# Altium PCB IRF7314.PcbDoc
Units mm, origin at the board's own origin, x right, y up, seen from the top; angles counter-clockwise.
Board outline 152.4 x 101.6 mm, 2 copper layers (Top Layer, Bottom Layer); 9 components, 0 nets, 30 pads, 0 vias.
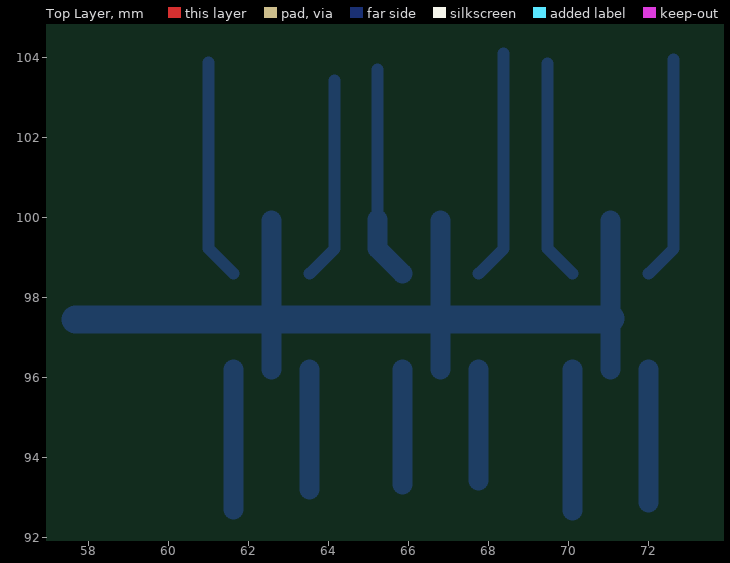
[diagram p0: Top Layer view]
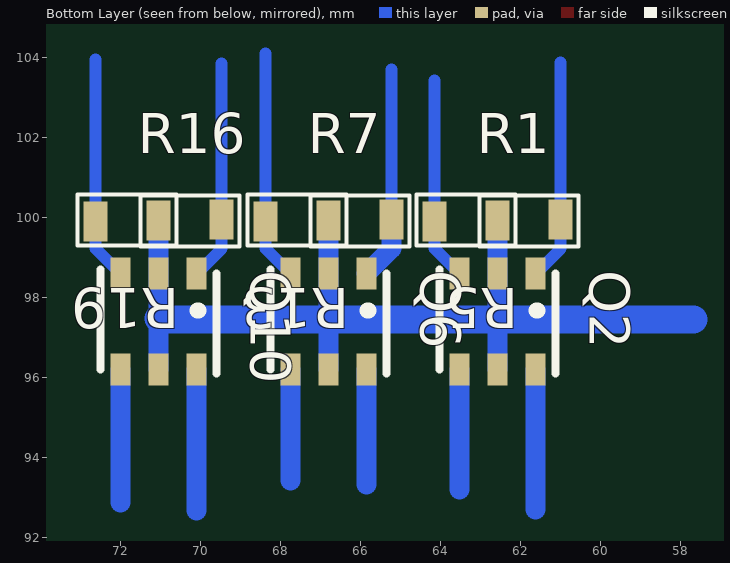
[diagram p1: Bottom Layer view, seen from below]

## Layer stack, top to bottom
Top Solder: solder mask 0.0102, Solder Resist, Dk 3.5
Top Layer: signal copper 0.0356
Dielectric 1: dielectric 0.32, FR-4, Dk 4.8
Bottom Layer: signal copper 0.0356
Bottom Solder: solder mask 0.0102, Solder Resist, Dk 3.5

## Board outline
25.4,25.4 177.8,25.4 177.8,127 25.4,127

## Design rules (kind name [scope] priority, off if disabled: settings)
Clearance [All] p1: gap=0.254
PolygonConnect [All] p1: connectstyle=Relief reliefconductorwidth=0.254 reliefentries=4 polygonreliefangle="90 Angle" airgapwidth=0.254
RoutingVias [All] p1: holewidth=0.711 width=1.27 viastyle="Through Hole" minholewidth=0.711 minwidth=1.27 maxholewidth=0.711 maxwidth=1.27
SolderMaskExpansion [All] p1: expansion=0.102
Width [All] p1: maxlimit=3 minlimit=0.254 preferedwidth=0.254
29 further rules are at their usual default settings.

## Components (designator, comment, footprint, x,y, rotation, side; value= is the part's Value field where it differs from the comment)
Q2 "IRF7314" "TSOP-6 (M)" 61.627,98.593 r270 bottom
Q6 "IRF7314" "TSOP-6 (M)" 65.852,98.593 r270 bottom
Q10 "IRF7314" "TSOP-6 (M)" 70.102,98.593 r270 bottom
R1 "10 kOm" "SMD 0603 (1608)" 62.577,99.918 r180 bottom
R5 "10 kOm" "SMD 0603 (1608)" 62.577,99.918 r0 bottom
R7 "10 kOm" "SMD 0603 (1608)" 66.802,99.918 r180 bottom
R13 "10 kOm" "SMD 0603 (1608)" 66.802,99.918 r0 bottom
R16 "10 kOm" "SMD 0603 (1608)" 71.052,99.918 r180 bottom
R19 "10 kOm" "SMD 0603 (1608)" 71.052,99.918 r0 bottom

## Footprints (in the part's own frame and the unit in brackets; to place one, negate y for a bottom-side part, rotate by r counter-clockwise, add the part's x,y. Pads: shape width x height; smd on the part's side, far side on the other; paste and mask are expansions set on the pad)
"SMD 0603 (1608)" [mm]
  rect 0.6x1 smd: 1(0,0) 2(1.575,0.025)
  silkscreen extent -0.45,-0.65 2.02,0.63, body extent 0.03,-0.4 1.58,0.45, height 0.45
"TSOP-6 (M)" [mm]
  rect 0.8x0.5 smd: 1(0,0) 2(0,-0.95) 3(0,-1.9) 4(2.4,-1.9) 5(2.4,-0.95) 6(2.4,0)
  silkscreen extent -0.1,-2.4 2.5,0.5, body extent -0.15,-2.45 2.55,0.55, height 1

## Part data
Q2 Q6 Q10: library part IRF5850, "Dual P-Ch  20V - 0.135? - 2.2A"
R1 R5 R7 R13 R16 R19: library part "Res All Types"

## Nets (pads, with @x,y where several pads share a name; then routed paths per layer and width w, separated by ;. In a path a pad name is that pad's centre, name@x,y a point inside that pad or via, vN(x,y) a via of type N, cw(c..) or ccw(c..) an arc to the next point about the centre after c; other vN are vias at no path point)
pads on no net: Q2.1 Q2.2 Q2.3 Q2.4 Q2.5 Q2.6 Q6.1 Q6.2 Q6.3 Q6.4 Q6.5 Q6.6 Q10.1 Q10.2 Q10.3 Q10.4 Q10.5 Q10.6 R1.1 R1.2 R5.1 R5.2 R7.1 R7.2 R13.1 R13.2 R16.1 R16.2 R19.1 R19.2
copper on no net: | length 76.4
  Bottom Layer w0.3: 61.002,103.868 61.002,99.943 61.002,99.218 61.627,98.593 ; 63.527,98.593 64.152,99.218 64.152,99.893 64.152,103.418 ; 65.227,99.943 65.227,103.693 ; 67.752,98.593 68.377,99.218 68.377,99.893 68.377,104.093 ; 69.477,103.843 69.477,99.943 69.477,99.218 70.102,98.593 ; 72.002,98.593 72.627,99.218 72.627,99.893 72.627,103.943
  Bottom Layer w0.5: 61.627,92.693 61.627,96.193 ; 62.577,96.193 62.577,97.443 62.577,98.593 62.577,99.918 ; 63.527,93.193 63.527,96.193 ; 65.227,99.943 65.227,99.218 65.852,98.593 ; 65.852,93.318 65.852,96.193 ; 66.802,96.193 66.802,97.443 66.802,99.918 ; 67.752,93.418 67.752,96.193 ; 70.102,92.668 70.102,96.193 ; 71.052,96.193 71.052,97.468 71.052,98.593 71.052,99.918 ; 72.002,92.868 72.002,96.193
  Bottom Layer w0.7: 57.677,97.443 62.577,97.443 66.802,97.443 71.027,97.443 71.052,97.468